# EAGLE board soic8 (EAGLE 6.1)
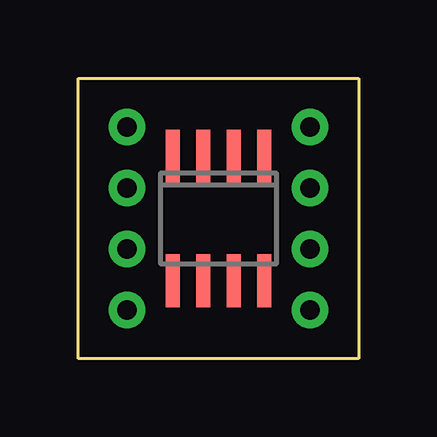
[diagram p0: board, top side]
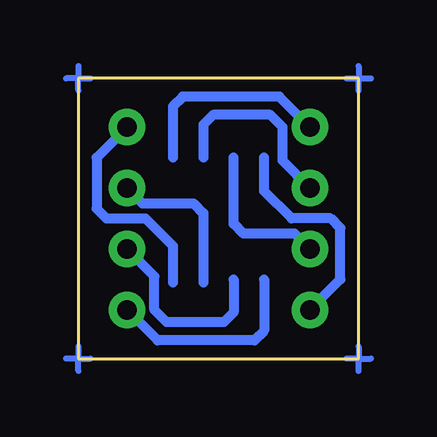
[diagram p1: board, bottom side, seen from below]

Size 11.68 x 11.68 mm. Coordinates in mm from the lower left corner, seen from the top.
Outline: 0,11.68 11.68,11.68 11.68,0 0,0 0,11.68
Copper layers (1*16): Top 0.035mm / dielectric 1.5mm / Bottom 0.035mm
Design rules: minimum track width 10mil, minimum drill 24mil, track to track 8mil, track to pad 8mil, pad to pad 8mil, via to via 8mil, smd to smd 8mil, copper to edge 40mil, drill to drill 8mil, minimum pad ring 10mil, minimum via ring 8mil, stop-mask expansion 4mil, vias tented up to drill 0mil, thermal gap 10mil

## Footprints (pad centres in the part's own frame; a part is rotated, then mirrored left to right if it is on the bottom)
SO08 = smd 0.6 x 2.2: 1 -1.905,-2.6; 2 -0.635,-2.6; 3 0.635,-2.6; 4 1.905,-2.6; 5 1.905,2.6; 6 0.635,2.6; 7 -0.635,2.6; 8 -1.905,2.6

## Placement (x,y rotation side)
E$1  [SO08]  5.84,5.84 180 top

## Library data of the parts
E$1 = linear

## Tracks (layer width: path | path; a pad name or v marks a point on that pad's centre or on a via)
S$1  (via drill 0.81 pad 1.52)
  Bottom 0.406: v2.03,9.65 3.3,10.92 7.34,10.92 7.75,10.52 7.75,8.38
S$2  (via drill 0.81 pad 1.52)
  Bottom 0.406: v2.03,7.11 3.17,8.25 3.17,9.65 3.68,10.16 6.07,10.16 6.48,9.75 6.48,8.38
S$3  (via drill 0.81 pad 1.52)
  Bottom 0.406: v2.03,4.57 2.67,5.21 4.8,5.21 5.21,5.61 5.21,8.38
S$4  (via drill 0.81 pad 1.52)
  Bottom 0.406: v2.03,2.03 0.76,3.3 0.76,5.44 1.17,5.84 2.79,5.84 3.94,6.99 3.94,8.38
S$5
  Bottom 0.254: 0,11.18 0,11.68 | 0.51,11.68 0,11.68 | 0,12.19 0,11.68 | 0,11.68 -0.51,11.68
S$6  (via drill 0.81 pad 1.52)
  Bottom 0.406: 3.94,3.3 3.94,1.17 4.34,0.76 8.38,0.76 v9.65,2.03
S$7  (via drill 0.81 pad 1.52)
  Bottom 0.406: v9.65,7.11 9.02,6.48 6.88,6.48 6.48,6.07 6.48,3.17
S$8  (via drill 0.81 pad 1.52)
  Bottom 0.406: v9.65,9.65 10.92,8.38 10.92,6.25 10.52,5.84 8.89,5.84 7.75,4.7 7.75,3.17
S$9  (via drill 0.81 pad 1.52)
  Bottom 0.406: 5.21,3.3 5.21,1.93 5.61,1.52 8,1.52 8.51,2.03 8.51,3.43 v9.65,4.57
S$11
  Bottom 0.254: 11.68,12.19 11.68,11.68 | 11.68,11.18 11.68,11.68 | 11.68,11.68 12.19,11.68 | 11.68,11.68 11.18,11.68
S$12
  Bottom 0.254: 11.68,0.51 11.68,0 | 11.68,-0.51 11.68,0 | 11.68,0 12.19,0 | 11.68,0 11.18,0
S$13
  Bottom 0.254: 0,0.51 0,0 | 0,-0.51 0,0 | 0,0 0.51,0 | 0,0 -0.51,0